# Altium PCB Glucometer-E.C.- Full V1.PcbDoc
Units mm, origin at the board's own origin, x right, y up, seen from the top; angles counter-clockwise.
Board outline 55 x 108 mm, 2 copper layers (Top Layer, Bottom Layer); 47 components, 57 nets, 234 pads, 33 vias.
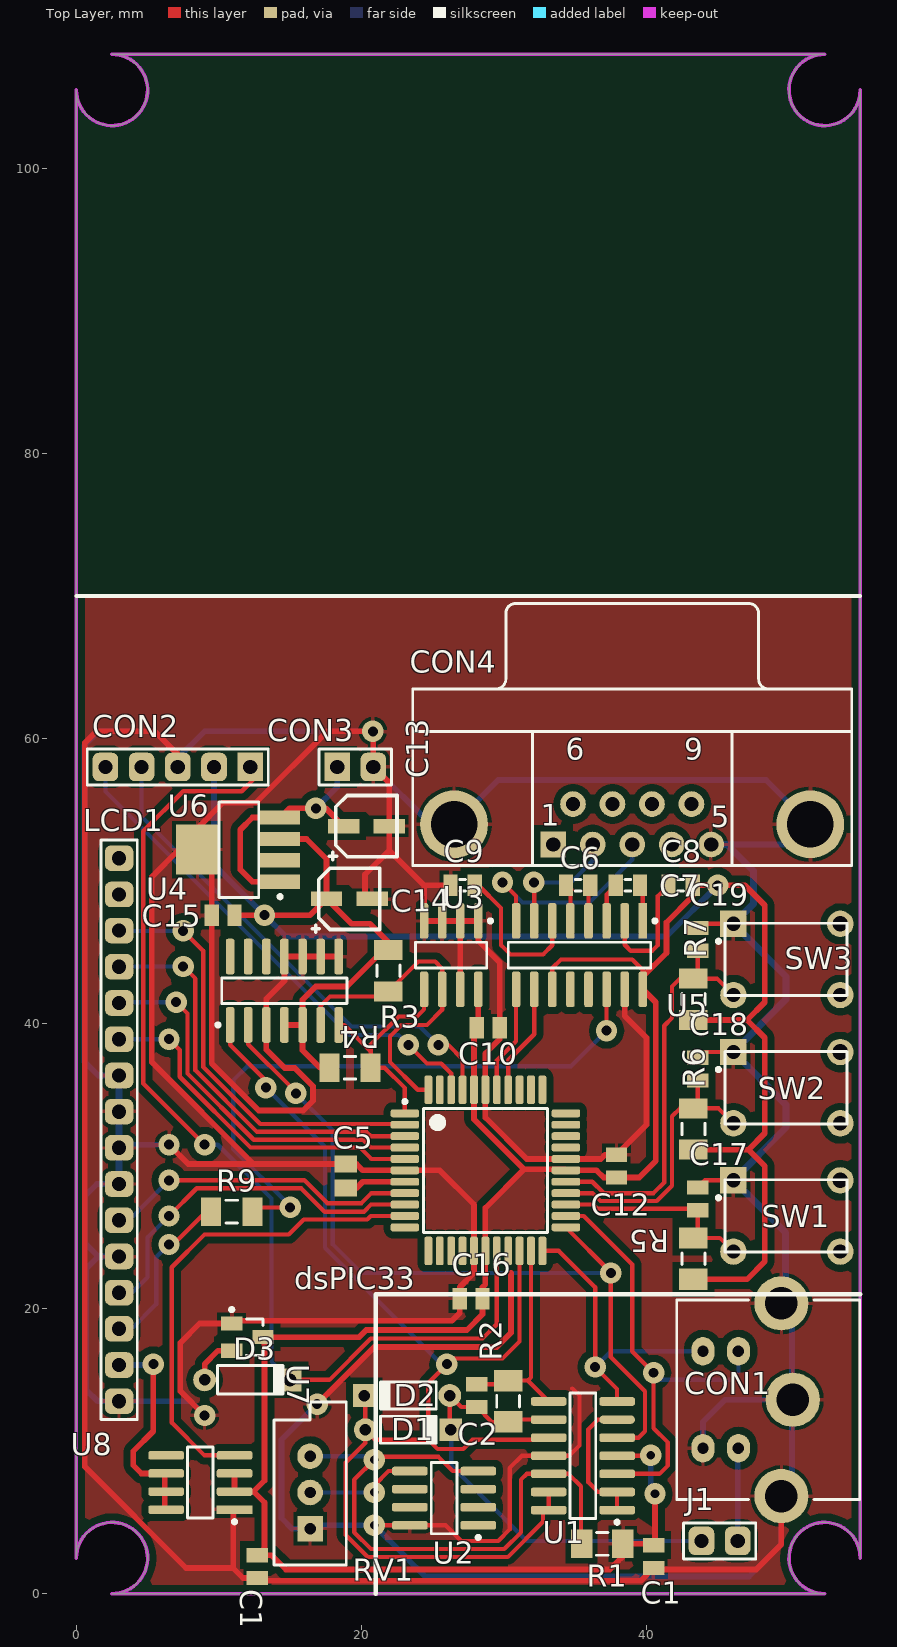
[diagram p0: Top Layer view]
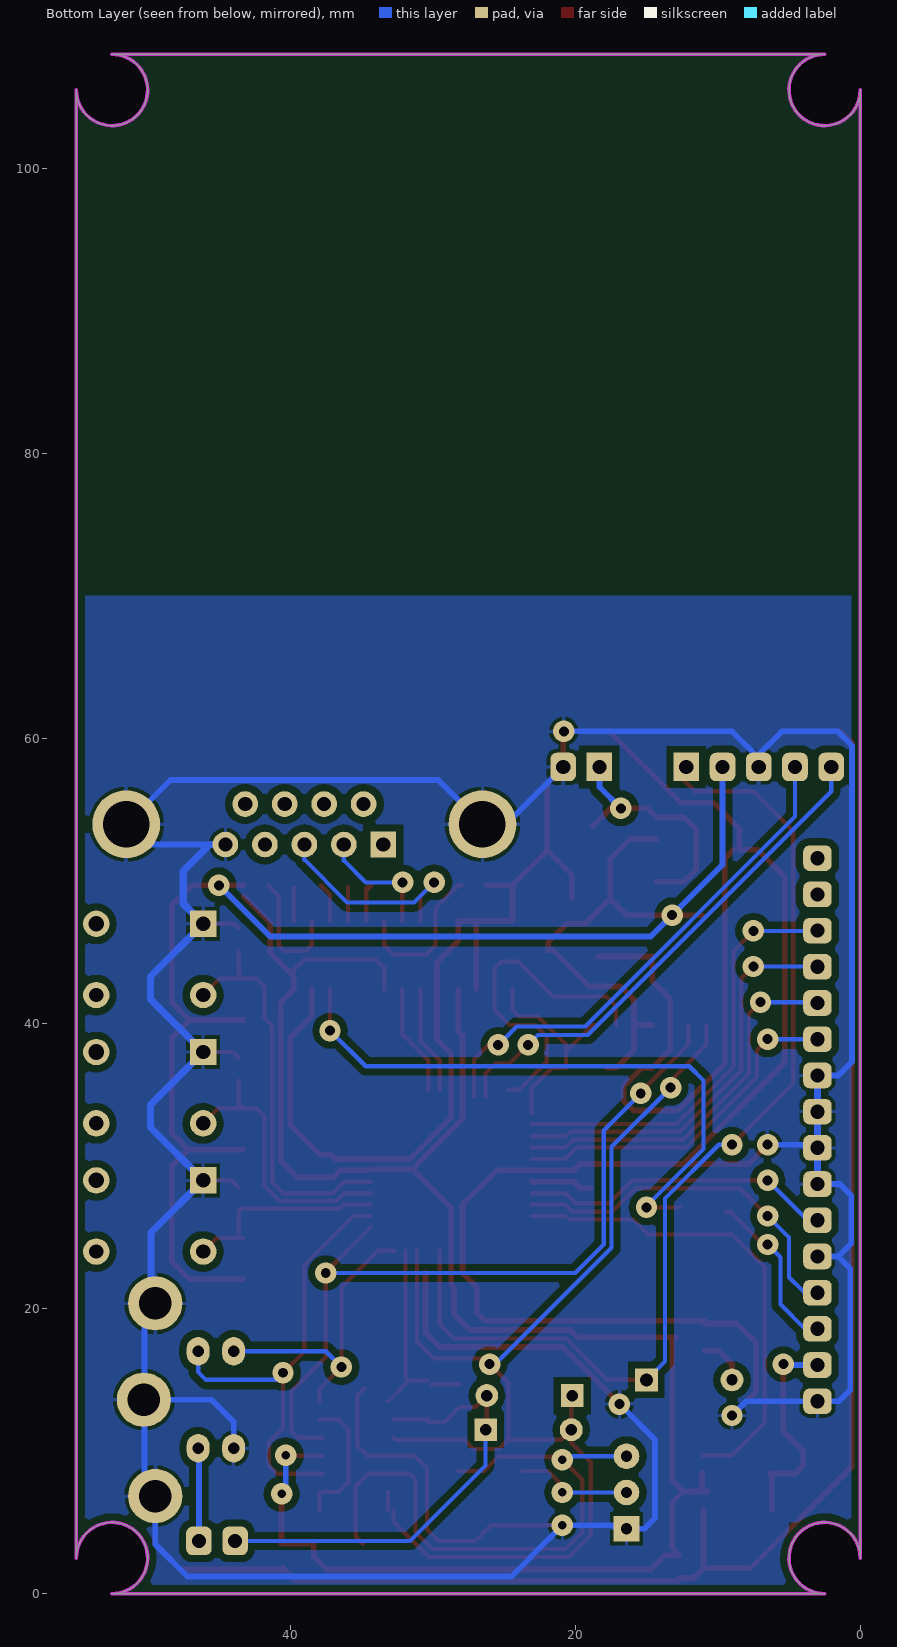
[diagram p1: Bottom Layer view, seen from below]

## Layer stack, top to bottom
Top Layer: signal copper 0.0356
Dielectric: dielectric 0.32, FR-4, Dk 4.8
Bottom Layer: signal copper 0.0356

## Board outline
0,2.5 cw(c2.5,2.5) 2.5,0 52.5,0 cw(c52.5,2.5) 55,2.5 55,105.5 cw(c52.5,105.5) 52.5,108 2.5,108 cw(c2.5,105.5) 0,105.5

## Design rules (kind name [scope] priority, off if disabled: settings)
Clearance [All] p1: gap=0.25
PolygonConnect [All] p1: connectstyle=Relief reliefconductorwidth=0.254 reliefentries=4 polygonreliefangle="90 Angle" airgapwidth=0.254
RoutingVias [All] p1: holewidth=0.711 width=1.27 viastyle="Through Hole" minholewidth=0.711 minwidth=1.27 maxholewidth=0.711 maxwidth=1.27
SolderMaskExpansion [All] p1: expansion=0.102
Width [All] p1: maxlimit=5 minlimit=0.25 preferedwidth=0.3 minimp=50.000000 maximp=50.000000 favimp=50.000000
28 further rules are at their usual default settings.

## Classes and differential pairs
component class "Glucometer-E.C.- Full V1": C1 C2 C5 C6 C7 C8 C9 C10 C13 C14 C15 C16 C17 C18 C19 CON1 CON3 CON4 D1 D2 D3 J1 LCD1 R1 R2 R3 R4 R5 R6 R7 R9 RV1 SW1 SW2 SW3 U1 U2 U3 U4 U5 U6 U7 U8

## Components (designator, comment, footprint, x,y, rotation, side; value= is the part's Value field where it differs from the comment)
C1 "Cap2" CAPC1608N 40.5,2.6 r270 top
C2 "Cap2" CAPC1608N 28.1,13.9 r90 top
C5 "Cap" CAPC2012N 18.9,29.3 r270 top
C6 "Cap" RESC1608N 38.7,49.7 r180 top
C7 "Cap" RESC1608N 35.2,49.7 r180 top
C8 "Cap" RESC1608N 42.4,49.7 r180 top
C9 "Cap" RESC1608N 27.1,49.7 r180 top
C10 "Cap" CAPC1608N 28.9,39.7 r180 top
C11 "Cap" CAPC1608N 12.7,1.9 r90 top
C12 "Cap" CAPC1608N 37.9,30 r270 top
C13 "Cap Pol2" C-4x4 22.5,56 r180 top
C14 "Cap Pol2" C-4x4 21.3,50.9 r180 top
C15 "Cap" CAPC1608N 10.3,47.6 r0 top
C16 "Cap" CAPC1608N 27.7,20.7 r0 top
C17 "Cap" CAPC1608N 43.6,27.7 r270 top
C18 "Cap" CAPC1608N 43.6,36.8 r270 top
C19 "Cap" CAPC1608N 43.6,45.9 r270 top
CON1 "" CDIN2.6-3H4A 54.964,13.606 r180 top
CON2 "Header 5" HDR1X5 12.2,58 r180 top
CON3 "Header 2" HDR1X2#1 18.3,58 r0 top
CON4 "D Connector 9" DSUB1.385-2H9 39,63.48 r0 top
D1 "1N4148" DO-35#1 23.3,11.5 r0 top
D2 "1N4148" DO-35#2 23.3,13.9 r180 top
D3 "1N4148" DO-35#3 12.2,15 r0 top
dsPIC33 "DSPIC33FJ64MC804-I/PT" TQFP-PT44_N 28.7,29.7 r0 top
J1 "Header 2" HDR1X2#2 46.4,3.7 r180 top
LCD1 "162A" HDR1X16 3,13.5 r90 top locked
R1 "Res1" RESC3216N#1 36.9,3.5 r0 top
R2 "Res1" RESC3216N#1 30.3,13.5 r270 top
R3 "Res1" RESC3216N#2 21.9,43.7 r270 top
R4 "Res1" RESC3216N#2 19.2,36.9 r0 top
R5 "Res1" RESC3216N#1 43.3,23.5 r270 top
R6 "Res1" RESC3216N#2 43.3,32.6 r270 top
R7 "Res1" RESC3216N#2 43.3,41.7 r270 top
R9 "Res1" RESC3216N#2 10.9,26.8 r0 top
RV1 "RPot" VR5 16.4,7.1 r90 top
SW1 "SW-PB" DPST-4 49.8,26.5 r0 top
SW2 "SW-PB" DPST-4 49.8,35.5 r0 top
SW3 "SW-PB" DPST-4 49.8,44.5 r0 top
U1 "LMC6044IN" M14A_N 35.541,9.674 r180 top
U2 "LM385BM" M08A_N 25.8,6.7 r180 top
U3 "24AA1025-I/SN" SOIC-SN8_N 26.3,44.8 r270 top
U4 "AD5241" R-14_N 14.6,42.3 r90 top
U5 "MAX3232CSE" NSO16_N 35.3,44.8 r270 top
U6 "LP38693MP-3.3/NOPB" MP05A_N 11.4,52.2 r180 top
U7 "Supply Voltage Supervisor" SOT23 12,18 r270 top
U8 "Power Switch ST" SO8_N 8.7,7.8 r180 top

## Footprints (in the part's own frame and the unit in brackets; to place one, negate y for a bottom-side part, rotate by r counter-clockwise, add the part's x,y. Pads: shape width x height; smd on the part's side, far side on the other; paste and mask are expansions set on the pad)
C-4x4 [mm] "SMD Polar Aluminium Capacitor, 4x4mm, 10V"
  rect 2.2x1 smd: 1(3.75,2.15) 2(0.55,2.15)
  silkscreen extent 0,0 4.75,4.5, body extent 0,0 4.3,4.3, height 5.4
CAPC1608N [mm] "Chip Capacitor, Body 1.6x0.8mm, IPC Medium Density"
  rect 1x1.5 smd: 1(-0.8,0) 2(0.8,0)
  body extent -0.87,-0.48 0.87,0.48, height 0.85
CAPC2012N [mm] "Chip Capacitor, Body 2.0x1.3mm, IPC Medium Density"
  rect 1.2x1.6 smd: 1(-0.85,0) 2(0.85,0)
  body extent -1.1,-0.72 1.1,0.72, height 1.1
CDIN2.6-3H4A [mm] "Connector; Circular DIN, Thru-Hole; 4 Position; Right Angle; Pitch 2.1/2.6 mm; Body 14 x 12.84 x 13 mm (WxTxH), Shielded, Special PCB Retention"
  oval 1.6x2 hole 0.8: 1(8.51,-3.4) 2(8.51,3.4) 3(11,-3.4) 4(11,3.4)
  round 3.8 hole 2.28: MH1(5.5,-6.76) MH2(4.7,0) MH3(5.5,6.76)
  silkscreen extent 0,-7 12.84,7, body extent 0,-7 12.84,7, height 13
DO-35#1 [mm] "Diode, Axial; Body 3.8 x 1.9 mm (LxDia. max), Lead Dia. 0.53 mm (max)"
  round 1.6 hole 0.8: 1(-3.025,0)
  rect 1.6x1.6 hole 0.8: 2(2.975,0)
  silkscreen extent -1.95,-0.95 2.05,0.95
DO-35#2 [mm] "Diode, Axial; Body 3.8 x 1.9 mm (LxDia. max), Lead Dia. 0.53 mm (max)"
  round 1.6 hole 0.8: 1(-2.9,0)
  rect 1.6x1.6 hole 0.8: 2(3.1,0)
  silkscreen extent -1.95,-0.95 2.05,0.95
DO-35#3 [mm] "Diode, Axial; Body 4.6 x 2 mm (LxDia. max), Lead Dia. 0.53 mm (max)"
  round 1.6 hole 0.8: 1(-3.2,0)
  rect 1.6x1.6 hole 0.9: 2(2.8,0)
  silkscreen extent -2.3,-1 2.4,1
DPST-4 [mm] "Switch; 4 Leads"
  rect 1.85x1.85 hole 1: 1(-3.7,2.5)
  round 1.85 hole 1: 2(-3.7,-2.5) 3(3.8,-2.5)
  round 1.85 hole 1.1: 4(3.8,2.5)
  silkscreen extent -4.88,-2.54 4.28,2.54
DSUB1.385-2H9 [mm] "Connector; D Subminiature; 9 Position; Right Angle; Pitch 1.385 mm"
  rect 1.8x1.8 hole 1: 1(-5.54,-10.92)
  round 1.8 hole 1: 2(-2.77,-10.92) 3(0,-10.92) 4(2.77,-10.92) 5(5.54,-10.92) 6(-4.155,-8.08) 7(-1.385,-8.08) 8(1.385,-8.08) 9(4.155,-8.08)
  round 4.76 hole 3.26: 10(-12.495,-9.5) 11(12.495,-9.5)
  silkscreen extent -15.4,-12.4 15.4,6
HDR1X2#1 [mm] "Connector; Header; 2 Position"
  rect 1.8x2 hole 1: 1(0,0)
  rrect50% 1.8x2 hole 1: 2(2.54,0)
  silkscreen extent -1.27,-1.27 3.81,1.27
HDR1X2#2 [mm] "Connector; Header; 2 Position"
  rrect50% 1.8x2 hole 1: 1(0,0) 2(2.54,0)
  silkscreen extent -1.27,-1.27 3.81,1.27
HDR1X5 [mm] "Connector; Header; 5 Position"
  rect 1.8x2 hole 1: 1(0,0)
  rrect50% 1.8x2 hole 1: 2(2.54,0) 3(5.08,0) 4(7.62,0) 5(10.16,0)
  silkscreen extent -1.27,-1.27 11.43,1.27
HDR1X16 [mm] "Connector; Header; 16 Position"
  rrect50% 1.8x2 hole 1: 1(0,0) 2(2.54,0) 3(5.08,0) 4(7.62,0) 5(10.16,0) 6(12.7,0) 7(15.24,0) 8(17.78,0) 9(20.32,0) 10(22.86,0) 11(25.4,0) 12(27.94,0) 13(30.48,0) 14(33.02,0) 15(35.56,0) 16(38.1,0)
  silkscreen extent -1.27,-1.27 39.37,1.27
M08A_N [mm] "SOIC, 8-Leads, Body 4.9x3.9mm, Pitch 1.27mm, IPC Medium Density"
  rrect50% 2.5x0.6 smd: 1(-2.4,1.905) 2(-2.4,0.635) 3(-2.4,-0.635) 4(-2.4,-1.905) 5(2.4,-1.905) 6(2.4,-0.635) 7(2.4,0.635) 8(2.4,1.905)
  silkscreen extent -2.53,-2.5 0.9,2.88, body extent -2,-2.5 2,2.5, height 1.75
M14A_N [mm] "SOIC, 14-Leads, Body 8.6x3.9mm, Pitch 1.27mm, IPC Medium Density"
  rrect50% 2.5x0.6 smd: 1(-2.4,3.81) 2(-2.4,2.54) 3(-2.4,1.27) 4(-2.4,0) 5(-2.4,-1.27) 7(-2.4,-3.81) 8(2.4,-3.81) 9(2.4,-2.54) 10(2.4,-1.27) 11(2.4,0) 12(2.4,1.27) 13(2.4,2.54) 14(2.4,3.81)
  oval 2.5x0.6 smd: 6(-2.4,-2.54)
  silkscreen extent -2.53,-4.4 0.9,4.78, body extent -2,-4.38 2,4.38, height 1.75
MP05A_N [mm] "SOT223, 5-Leads, Body 6.5x3.5mm, Pitch 1.5mm, Lead Span 7mm, IPC Medium Density"
  rect 2.8x1 smd: 1(-2.9,2.25) 2(-2.9,0.75) 3(-2.9,-0.75) 4(-2.9,-2.25)
  rect 3x3.5 smd: 5(2.9,0)
  silkscreen extent -3.03,-3.35 1.4,3.42, body extent -1.85,-3.35 1.85,3.35, height 1.8
NSO16_N [mm] "SOIC, 16-Leads, Body 9.9x3.9mm, Pitch 1.27mm, IPC Medium Density"
  rect 2.5x0.6 smd: 1(-2.4,4.445)
  rrect50% 2.5x0.6 smd: 2(-2.4,3.175) 3(-2.4,1.905) 4(-2.4,0.635) 5(-2.4,-0.635) 6(-2.4,-1.905) 7(-2.4,-3.175) 8(-2.4,-4.445) 9(2.4,-4.445) 10(2.4,-3.175) 11(2.4,-1.905) 12(2.4,-0.635) 13(2.4,0.635) 14(2.4,1.905) 15(2.4,3.175) 16(2.4,4.445)
  silkscreen extent -2.52,-5 0.9,5.42, body extent -2,-5 2,5, height 1.75
R-14_N [mm] "14-Pin Narrow Body Small Outline Integrated Circuit 1.27 mm Pitch, IPC Medium Density"
  rrect50% 2.5x0.6 smd: 1(-2.4,3.81) 2(-2.4,2.54) 3(-2.4,1.27) 4(-2.4,0) 5(-2.4,-1.27) 6(-2.4,-2.54) 7(-2.4,-3.81) 8(2.4,-3.81) 9(2.4,-2.54) 10(2.4,-1.27) 11(2.4,0) 12(2.4,1.27) 13(2.4,2.54) 14(2.4,3.81)
  silkscreen extent -2.52,-4.4 0.9,4.78, body extent -1.95,-4.33 1.95,4.33, height 1.75
RESC1608N [mm] "Chip Resistor, Body 1.6x0.8mm, IPC Medium Density"
  rect 1x1.5 smd: 1(-0.85,0) 2(0.85,0)
  silkscreen extent -0.2,-0.4 0.2,0.4, body extent -0.85,-0.48 0.85,0.48, height 0.6
RESC3216N#1 [mm] "Chip Resistor, Body 3.2x1.6mm, IPC Medium Density"
  rect 1.5x2 smd: 1(-1.45,0) 2(1.45,0)
  silkscreen extent -0.4,-0.8 0.4,0.8, body extent -1.68,-0.87 1.68,0.87, height 0.71
RESC3216N#2 [mm] "Chip Resistor, Body 3.2x1.6mm, IPC Medium Density"
  rect 1.4x2 smd: 1(-1.45,0) 2(1.45,0)
  silkscreen extent -0.4,-0.8 0.4,0.8, body extent -1.68,-0.87 1.68,0.87, height 0.71
SO8_N [mm] "SOIC, 8-Leads, Body 4.9x3.9mm, Pitch 1.27mm, IPC Medium Density"
  rect 2.5x0.6 smd: 1(-2.4,1.905)
  rrect50% 2.5x0.6 smd: 2(-2.4,0.635) 3(-2.4,-0.635) 4(-2.4,-1.905) 5(2.4,-1.905) 6(2.4,-0.635) 7(2.4,0.635) 8(2.4,1.905)
  silkscreen extent -2.53,-2.5 0.9,2.88, body extent -2,-2.5 2,2.5, height 1.75
SOIC-SN8_N [mm] "SOIC, 8-Leads, Body 4.9x3.8mm, Pitch 1.27mm, IPC Medium Density"
  rrect50% 2.5x0.6 smd: 1(-2.4,1.905) 2(-2.4,0.635) 3(-2.4,-0.635) 4(-2.4,-1.905) 5(2.4,-1.905) 6(2.4,-0.635) 7(2.4,0.635) 8(2.4,1.905)
  silkscreen extent -2.52,-2.5 0.9,2.88, body extent -2,-2.5 2,2.5, height 1.75
SOT23 [mm] "SOT-23; 3 Leads; Body 3.0 x 2.6 mm, inc. leads (LxW max)"
  rect 1x1.5 smd: 1(-0.95,-1.1) 2(0.95,-1.1) 3(0,1.1)
  silkscreen extent -2.05,-1.22 1.28,1.1
TQFP-PT44_N [mm] "Thin QFP, 44-Leads, Body 10x10mm, Pitch 0.8mm, IPC Medium Density"
  rrect50% 2x0.55 smd: 1(-5.65,4) 2(-5.65,3.2) 3(-5.65,2.4) 4(-5.65,1.6) 5(-5.65,0.8) 6(-5.65,0) 7(-5.65,-0.8) 8(-5.65,-1.6) 9(-5.65,-2.4) 10(-5.65,-3.2) 11(-5.65,-4) 23(5.65,-4) 24(5.65,-3.2) 25(5.65,-2.4) 26(5.65,-1.6) 27(5.65,-0.8) 28(5.65,0) 29(5.65,0.8) 30(5.65,1.6) 31(5.65,2.4) 32(5.65,3.2) 33(5.65,4)
  rrect50% 0.55x2 smd: 12(-4,-5.65) 13(-3.2,-5.65) 14(-2.4,-5.65) 15(-1.6,-5.65) 16(-0.8,-5.65) 17(0,-5.65) 18(0.8,-5.65) 19(1.6,-5.65) 20(2.4,-5.65) 21(3.2,-5.65) 22(4,-5.65) 34(4,5.65) 35(3.2,5.65) 36(2.4,5.65) 37(1.6,5.65) 38(0.8,5.65) 39(0,5.65) 40(-0.8,5.65) 41(-1.6,5.65) 42(-2.4,5.65) 43(-3.2,5.65) 44(-4,5.65)
  silkscreen extent -5.77,-4.35 4.35,4.95, body extent -5,-5 5,5, height 1.2
VR5 [mm] "Thru-Hole; 3 Leads"
  rect 1.8x1.8 hole 0.8: 1(-2.54,0)
  round 1.8 hole 0.8: 2(0,0) 3(2.54,0)
  silkscreen extent -5.08,-2.54 6.35,2.54

## Part data
C1 C2 C5 C6 C7 C8 C9 C10 C11 C12 C15 C16 C17 C18 C19: "Capacitor"
C13 C14: "Polarized Capacitor (Axial)"
CON1: library part "MiniDin 4Pins - SuperVideo", "MiniDin 4 Pins"
CON2: "Header, 5-Pin"
CON3 J1: "Header, 2-Pin"
CON4: "Receptacle Assembly, 9 Position, Right Angle"
D1 D2 D3: "High Conductance Fast Diode"
dsPIC33: "High-Performance 16-bit Digital Signal Controller, 64 KB Flash, 16 KB RAM, 44-Pin TQFP, Industrial Temperature"
LCD1: "16 char * 2 line LCD character display with b/light"
R1 R2 R3 R4 R5 R6 R7 R9: "Resistor"
RV1: "Potentiometer"
SW1 SW2 SW3: "Switch"
U1: "CMOS Quad Micropower Operational Amplifier, 14-pin MDIP"
U2: "Adjustable Micropower Voltage Reference, 8-pin Narrow SOIC"
U3: "1 Mbit, 400kHz, 1.7V, 8-Pin SOIC 150mil, Industrial Temperature"
U4: "AD5241BR"
U5: "3.0V TO 5.5V, Low-Power, up to 1Mbps, True RS-232 Transceiver Using Four 0.1µF External Capacitor"
U6: "500mA Low Dropout CMOS Linear Regulators Stable with Ceramic Output Capacitors, 5-pin SOT-223, Pb-Free"
U8: "STMPS2161"

## Via types
v1: diameter 1.5, hole 0.7, Top Layer to Bottom Layer, 28 vias
v2: diameter 1.5, hole 0.6, Top Layer to Bottom Layer, 5 vias

## Nets (pads, with @x,y where several pads share a name; then routed paths per layer and width w, separated by ;. In a path a pad name is that pad's centre, name@x,y a point inside that pad or via, vN(x,y) a via of type N, cw(c..) or ccw(c..) an arc to the next point about the centre after c; other vN are vias at no path point)
3.3V: C1.1 C8.1 C10.2 C11.2 C12.2 C14.1 C15.2 C16.2 CON2.2 dsPIC33.17 dsPIC33.28 dsPIC33.40 R1.2 R3.1 R4.1 R5.2 R6.2 R7.2 U1.4 U3.8 U4.4 U4.5 U5.11 U5.16 U6.3 U7.3 U8.2 U8.3 | length 265
  Top Layer w0.3: U5.11 33.395,43.895 34,44.5 39,44.5 39.745,43.755 U5.16@39.745,43.296 ; U1.4@37.741,9.674 v2@40.274,9.674
  Top Layer w0.4: U8.2@10.7,7.165 U8.2 ; U8.3 U8.2 ; C15.2 v1(13.2,47.6) 16.4,47.6 C14.1 ; U7.3@12.9,18 13.2,17.7 13.2,7.93 12.435,7.165 ; U7.3 19.844,18 20.344,18.5 27.4,18.5 28.5,19.6 C16.2 28.5,21.5 28.7,21.7 dsPIC33.17 28.7,27.069 31.406,29.775 ; U6.3 16.15,52.95 17.55,51.55 C14.1 ; U4.4 U4.5 ; R4.1 17.1,36.9 15.87,38.13 U4.5 ; U3.8 28.205,39.5 27.9,39.195 dsPIC33.40 27.9,33.281 31.406,29.775 ; v2@40.274,9.674 v2(40.3,9.7) ; C1.1@40.4,3.5 R1.2 38.35,2.627 37.423,1.7 14.7,1.7 13.7,2.7 C11.2 13.2,3.2 13.2,6.4 12.435,7.165 ; C1.1@40.6,3.5 40.6,6.5 41.1,7 v2(40.6,7) ; 43.25,48.95 41.4,47.1 41.4,44.951 39.745,43.296 U5.16 40.65,41.495 40.65,30.35 39.5,29.2 C12.2 37,29.2 36.5,29.7 dsPIC33.28 34.275,29.775 31.406,29.775 ; C8.1 46.9,49.7 48.3,48.3 48.3,41.5 47.05,40.25 ; R5.2 47.05,22.05 48.3,23.3 48.3,30 47.15,31.15 ; R6.2 47.15,31.15 ; R7.2 47.05,40.25 ; U8.2 12.435,7.165 ; U4.5 15.87,41.67 16.8,42.6 19,42.6 21.55,45.15 R3.1 21.9,45.7 20.6,47 19.3,47 C14.1 ; 47.05,40.25 48.3,39 48.3,32.3 47.15,31.15
  Bottom Layer w0.4: CON2.2 9.66,51.14 v1(13.2,47.6) 14.7,46.1 41.4,46.1 v1(45,49.7) ; v2(40.3,9.7) 40.3,7.3 v2(40.6,7)
-V: R9.2 U5.14 | length 43.4
  Top Layer w0.3: R9.2@12.65,27.1 v1(15,27.1) ; v1(37.2,39.5) U5.14@37.2,42.395
  Bottom Layer w0.3: v1@14.9,27.1 14.9,27.3 11,31.2 11,36 12,37 34.7,37 v1(37.2,39.5)
BTN_D: C19.2 dsPIC33.27 R7.1 SW3.2 | length 28.6
  Top Layer w0.3: dsPIC33.27 36.2,28.9 37,28.1 40.5,28.1 41.25,28.85 41.25,39.85 41.8,40.4 41.8,42.6 42.35,43.15 R7.1 ; C19.2 43.6,43.45 R7.1 ; SW3.2 44.95,43.15 R7.1
BTN_E: C18.2 dsPIC33.26 R6.1 SW2.2 | length 20
  Top Layer w0.3: dsPIC33.26 36.222,28.1 36.772,27.55 40.728,27.55 41.8,28.622 41.8,33.5 42.35,34.05 R6.1 ; C18.2 43.6,34.35 R6.1 ; SW2.2 45.05,34.05 R6.1
BTN_U: C17.2 dsPIC33.25 R5.1 SW1.2 | length 14.3
  Top Layer w0.3: dsPIC33.25 36.244,27.3 36.544,27 43.5,27 C17.2 R5.1@43.6,25.25 ; R5.1 45.15,24.95 SW1.2
CNT: CON1.3 dsPIC33.22 U1.7 | length 21.4
  Top Layer w0.3: dsPIC33.22 33.85,24.05 36.4,21.5 v1(36.4,15.9) 37.941,14.359 U1.7
  Bottom Layer w0.3: v1(36.4,15.9) 37.506,17.006 CON1.3
DB4: dsPIC33.5 LCD1.11 | length 24.6
  Top Layer w0.3: v1(6.5,38.9) 7.25,38.15 7.25,36.268 12.218,31.3 19.9,31.3 20.7,30.5 dsPIC33.5
  Bottom Layer w0.3: LCD1.11 v1(6.5,38.9)
DB5: dsPIC33.4 LCD1.12 | length 26.8
  Top Layer w0.3: v1(7,41.5) 7.8,40.7 7.8,36.496 12.446,31.85 20.128,31.85 20.678,31.3 dsPIC33.4
  Bottom Layer w0.3: LCD1.12 3.06,41.5 v1(7,41.5)
DB6: dsPIC33.3 LCD1.13 | length 28.8
  Top Layer w0.3: v1(7.5,44) 8.35,43.15 8.35,36.724 12.674,32.4 20.356,32.4 20.656,32.1 dsPIC33.3
  Bottom Layer w0.3: LCD1.13 3.02,44 v1(7.5,44)
DB7: dsPIC33.2 LCD1.14 | length 30.4
  Top Layer w0.3: v1(7.5,46.5) 8.9,45.1 8.9,36.951 12.901,32.95 23,32.95 dsPIC33.2
  Bottom Layer w0.3: LCD1.14@3.02,46.5 v1(7.5,46.5)
E: dsPIC33.8 LCD1.6 | length 22.2
  Top Layer w0.3: v1(6.5,29) 16,29 17.6,27.4 20,27.4 20.7,28.1 dsPIC33.8
  Bottom Layer w0.3: LCD1.6 3.7,26.2 v1(6.5,29)
GND: C1.2 C5.1 C9.2 C10.1 C11.1 C12.1 C13.2 C14.2 C15.1 C16.1 C17.1 C18.1 C19.1 CON1.4 CON1.MH1 CON1.MH2 CON1.MH3 CON2.3 CON3.2 CON4.5 CON4.10 CON4.11 dsPIC33.6 dsPIC33.16 dsPIC33.29 dsPIC33.39 LCD1.1 LCD1.5 LCD1.7 LCD1.8 LCD1.9 LCD1.10 RV1.1 SW1.1 SW2.1 SW3.1 U1.11 U2.8 U3.1 U3.2 U3.3 U3.4 U3.7 U4.3 U4.8 U4.9 U4.10 U4.11 U5.15 U6.5 U7.1 U8.1 | length 626
  Top Layer w0.3: v2(20.9,4.8) 25.9,4.8 27,3.7 29.6,3.7 30.4,4.5 30.4,8.808 31.266,9.674 U1.11 34.574,9.674 35.3,10.4 35.3,13.9 34.8,14.4 ; C17.1 44.1,29 SW1.1 ; C18.1 44,38 SW2.1 ; C19.1 43.9,47 SW3.1
  Top Layer w0.4: v1(6.5,31.5) 7.85,30.15 12.43,30.15 ; CON2.3 7.12,58.88 5.5,60.5 1.4,60.5 0.6,59.7 0.6,8.9 7.7,1.8 11,1.8 ; U6.5@8.9,52.2 9.5,51.6 C15.1 9.5,37.2 12.8,33.9 15.92,33.9 16.6,34.58 16.6,35.6 15.32,36.88 14.62,36.88 13.33,38.17 U4.3 13.33,41.73 14.6,43 U4.11 U4.10 U4.9 U4.8 ; v1(9,12.5) 7.3,14.2 7.3,17.6 8.65,18.95 U7.1 ; U7.1@10.9,19.15 26.35,19.15 26.9,19.7 C16.1 26.9,21.5 27.9,22.5 dsPIC33.16 27.9,27.3 25.5,29.7 dsPIC33.6 20.1,29.7 19.65,30.15 C5.1 12.43,30.15 ; U8.1@11,5.895 11,1.8 ; C11.1@12.7,0.9 39.6,0.9 C1.2 ; C11.1 11.7,1.1 11,1.8 ; v1(16.9,13.3) 20.9,17.3 29.5,17.3 30.5,18.3 30.5,22.5 ; C14.2@20.25,48.75 20.25,50.45 21.95,52.15 ; U3.4 U3.3 U3.2 ; U3.4@24.4,47.205 24.4,49.7 ; C9.2 24.4,49.7 ; U3.7 U3.2 ; U5.15 38.475,40.525 40,39 40,32.9 C12.1 37.1,30.8 36.8,30.5 dsPIC33.29 31.6,30.5 28.7,33.4 dsPIC33.39 28.7,37.9 29.7,38.9 C10.1 29.7,44.3 28.205,45.795 U3.1 U3.2 ; C1.2@40.5,1.7 47.7,1.7 49.464,3.464 CON1.MH3 ; 12.43,30.15 5.3,37.28 5.3,50.3 7.2,52.2 U6.5 8.5,53.7 10.3,55.5 12.6,55.5 17.6,60.5 v1(20.8,60.5) 20.84,60.46 CON3.2 21.95,56.89 C13.2 21.95,52.15 ; 21.95,52.15 24.4,49.7
  Bottom Layer w0.3: CON4.11@50.075,52.56 CON4.11
  Bottom Layer w0.4: LCD1.5 1.54,23.66 ; LCD1.7 1.44,28.74 0.627,27.927 0.627,24.573 1.54,23.66 ; LCD1.8 3.22,31.5 v1(6.5,31.5) ; LCD1.10 1.54,36.36 0.577,37.323 0.577,59.5 1.577,60.5 5.5,60.5 7.12,58.88 CON2.3@7.12,58.62 ; CON2.3 CON2.3@7.12,58.62 ; v1(9,12.5) 8,13.5 LCD1.1 1.5,13.5 0.7,14.3 0.7,22.82 1.54,23.66 ; RV1.1 15.14,4.56 14.4,5.3 14.4,10.8 v1(16.9,13.3) ; RV1.1@17.1,4.56 17.34,4.8 v2(20.9,4.8) 23.1,2.6 ; v1(20.8,60.5) 9,60.5 CON2.3@7.12,58.62 ; CON3.2@20.84,58.76 CON3.2 24.86,53.98 CON4.10 ; 23.1,2.577 24.477,1.2 47.2,1.2 49.464,3.464 49.464,6.812 CON1.MH3 ; CON4.10@26.485,54 CON4.10 ; CON1.4 43.964,12.064 45.506,13.606 CON1.MH2@50.216,13.606 ; CON4.5 CON4.11@50.075,52.56 ; CON1.MH3@50.216,7.564 CON1.MH2@50.216,13.606 ; CON1.MH1@50.216,19.484 CON1.MH2@50.216,13.606 ; CON1.MH2 CON1.MH2@50.216,13.606 ; CON4.11 48.395,57.08 29.605,57.08 CON4.10
  Bottom Layer w0.5: LCD1.7 LCD1.8 LCD1.9 LCD1.10 ; CON4.5 45.64,52.56 47.5,50.7 47.5,48.4 SW3.1 49.8,43.3 49.8,41.7 SW2.1 49.8,34.3 49.8,32.7 SW1.1 49.764,25.336 CON1.MH1@49.764,20.366 ; CON1.MH1@49.416,20.284 CON1.MH1@50.216,19.484 ; CON1.MH3@49.464,6.812 CON1.MH3@50.216,7.564
LCDPWR: dsPIC33.10 U8.4 | length 34.1
  Top Layer w0.3: U8.4 8.995,9.705 6.7,12 6.7,22.9 9,25.2 14.9,25.2 15.95,26.25 20.406,26.25 20.656,26.5 dsPIC33.10
LCDVDD: LCD1.2 U8.6 U8.7 U8.8 | length 15.1
  Top Layer w0.4: v1(5.4,16.1) 5.4,11.4 4,10 4,9 4.565,8.435 U8.6@6.2,8.435 ; U8.8@6.2,5.895 U8.6@6.2,8.435 ; U8.6 U8.6@6.2,8.435
  Bottom Layer w0.4: LCD1.2 v1@5.34,16.04
LCDVO: LCD1.3 R9.1 | length 11.8
  Top Layer w0.3: LCD1.3 LCD1.3@3.03,18.55 ; v1(6.5,24.5) 6.8,24.5 9.1,26.8 R9.1@9.4,26.8
  Bottom Layer w0.3: LCD1.3 3.88,18.58 5.6,20.3 5.6,23.6 v1(6.5,24.5)
MCLR: CON2.1 D3.2 dsPIC33.18 | length 75.2
  Top Layer w0.3: v1(9,31.5) 4.7,35.8 4.7,53.5 7.5,56.3 11.6,56.3 12.6,57.3 CON2.1@12.6,58.5 ; D3.2 17.751,15 20.651,17.9 28.5,17.9 29.5,18.9 dsPIC33.18
  Bottom Layer w0.3: v1(9,31.5) 9.922,31.5 13.7,27.722 13.7,16.3 D3.2
NetC5_2: C5.2 dsPIC33.7 | length 4.3
  Top Layer w0.4: C5.2 19.65,28.45 20.1,28.9 dsPIC33.7
NetC6_1: C6.1 U5.1 | length 2.3
  Top Layer w0.3: U5.1 C6.1@39.745,49.505
NetC6_2: C6.2 U5.3 | length 2.8
  Top Layer w0.3: U5.3 37.205,49.055 C6.2
NetC7_1: C7.1 U5.4 | length 2.4
  Top Layer w0.3: U5.4 C7.1@35.935,49.585
NetC7_2: C7.2 U5.5 | length 2.6
  Top Layer w0.3: U5.5 C7.2@34.665,49.385
  Top Layer w0.4: C7.2 C7.2@34.665,49.385
NetC8_2: C8.2 U5.2 | length 8.9
  Top Layer w0.3: U5.2 38.475,45.525 38.9,45.1 40.4,45.1 40.8,45.5 40.8,48.95 C8.2
NetC9_1: C9.1 U5.6 | length 10.9
  Top Layer w0.3: C9.1 28.2,49.7 29.8,48.1 29.8,45.5 30.45,44.85 32.75,44.85 33.395,45.495 U5.6
NetD3_1: D3.1 U7.2 | length 3.4
  Top Layer w0.4: D3.1 9,16.1 9.95,17.05 U7.2
NetdsPIC33_11: dsPIC33.11
NetdsPIC33_12: dsPIC33.12
NetdsPIC33_13: dsPIC33.13
NetdsPIC33_14: dsPIC33.14
NetdsPIC33_15: dsPIC33.15
NetdsPIC33_19: dsPIC33.19
NetdsPIC33_30: dsPIC33.30
NetdsPIC33_31: dsPIC33.31
NetdsPIC33_32: dsPIC33.32
NetdsPIC33_33: dsPIC33.33
NetdsPIC33_34: dsPIC33.34
NetdsPIC33_35: dsPIC33.35
NetdsPIC33_36: dsPIC33.36
NetdsPIC33_43: dsPIC33.43
NetR1_1: R1.1 RV1.3 U1.12 U2.4 | length 42.7
  Top Layer w0.3: U2.4 26.405,8.605 25.41,9.6 21.1,9.6 v2(20.9,9.4) 19.5,8 19.5,4.3 20.673,3.127 30.027,3.127 31.2,4.3 31.2,8 31.604,8.404 U1.12 34.536,8.404 35.4,7.54 35.4,4 R1.1@34.9,3.5
  Bottom Layer w0.3: RV1.3@17.1,9.64 20.66,9.64 v2(20.9,9.4)
NetRV1_3: RV1.2 U2.5 | length 7.5
  Top Layer w0.3: v2(20.9,7.1) 20.9,7.6 21.9,8.6 U2.5@23.7,8.6
  Bottom Layer w0.3: RV1.2@17.1,7.1 v2(20.9,7.1)
NetU1_1: U1.1 U1.2 U1.6 | length 9.6
  Top Layer w0.3: U1.1 U1.2 36.606,7.134 35.916,7.824 35.916,11.524 36.606,12.214 U1.6
PEGC: CON2.5 dsPIC33.42 | length 36.7
  Top Layer w0.3: CON2.5@2.04,57.16 CON2.5 ; v1(23.3,38.5) 24.6,37.2 25.6,37.2 26.3,36.5 dsPIC33.42@26.3,34.85
  Bottom Layer w0.3: CON2.5 2.04,56.282 19.122,39.2 22.6,39.2 v1(23.3,38.5)
PEGD: CON2.4 dsPIC33.41 | length 36.2
  Top Layer w0.3: CON2.4@4.98,58 CON2.4@4.98,58.5 ; v1(25.4,38.5) 26.1,38.5 27.1,37.5 dsPIC33.41@27.1,34.85
  Bottom Layer w0.3: CON2.4 4.58,54.52 19.3,39.8 24.1,39.8 v1(25.4,38.5)
REF: CON1.1 dsPIC33.24 U1.3 | length 33
  Top Layer w0.3: dsPIC33.24 35.6,26.5 39,23.1 39,17 v1(40.5,15.5) 40.5,11.6 41.5,10.6 41.5,9 40.904,8.404 U1.3 U1.3@37.741,8.404
  Bottom Layer w0.3: v1(40.5,15.5) 41,15 45.908,15 46.454,15.546 CON1.1
RS: dsPIC33.9 LCD1.4 | length 25.6
  Top Layer w0.3: v1(6.5,26.5) 8.45,28.45 15.772,28.45 17.422,26.8 20.178,26.8 20.678,27.3 dsPIC33.9
  Bottom Layer w0.3: LCD1.4 3.92,21.12 5,22.2 5,25 v1(6.5,26.5)
RXD: CON4.2 U5.7 | length 8.2
  Top Layer w0.3: U5.7 v1@32.125,49.525
  Bottom Layer w0.3: v1(32.1,49.9) 34.7,49.9 36.23,51.43 CON4.2
SCL1: dsPIC33.44 R3.2 U3.6 U4.6 | length 24
  Top Layer w0.3: U4.6 17.14,41.24 17.8,41.9 21.55,41.9 R3.2 24,44.35 25.18,44.35 25.665,43.865 25.665,40.965 24.6,39.9 22.8,39.9 22,39.1 22,37.3 23.95,35.35 dsPIC33.44
SDA1: dsPIC33.1 R4.2 U3.5 U4.7 | length 15.6
  Top Layer w0.3: U4.7 18.8,39.9 20.65,38.05 ; dsPIC33.1 23.05,35.472 21.622,36.9 R4.2 20.65,38.05 ; U3.5 24.395,40.995 23.9,40.5 22.622,40.5 20.65,38.528 20.65,38.05
TXD: CON4.3 U5.8 | length 15.4
  Top Layer w0.3: v1(29.9,49.9) 30.855,48.945 U5.8 ; v1@30.205,49.595 v1@30.455,49.845
  Bottom Layer w0.3: v1(29.9,49.9) 31.3,48.5 36,48.5 39,51.5 CON4.3
U1RX: dsPIC33.38 U5.9 | length 7.6
  Top Layer w0.3: dsPIC33.38 29.5,37.4 30.855,38.755 U5.9
U1TX: dsPIC33.37 U5.10 | length 7.8
  Top Layer w0.3: dsPIC33.37 30.3,37.422 32.125,39.247 U5.10
VCTRL: dsPIC33.23 U1.5 U4.2 | length 56.5
  Top Layer w0.3: U4.2 12.06,38.54 v1@15.05,35.55 ; dsPIC33.23 37.5,22.55 v1(37.5,22.5) 37.5,16.6 39.9,14.2 39.9,11.4 39.444,10.944 U1.5@37.741,10.944
  Bottom Layer w0.3: v1(15.4,35.1) 18,32.5 18,24.5 20,22.5 v1(37.5,22.5)
VDD: C13.1 CON3.1 U6.1 U6.4 | length 17.9
  Top Layer w0.4: U6.1 12.35,49.95 11.5,50.8 11.5,53.6 12.35,54.45 U6.4 14.95,55.1 v1(16.8,55.1) 17.5,55.1 C13.1
  Bottom Layer w0.4: v1(16.8,55.1) 18.3,56.6 CON3.1
VGND: D1.1 D2.2 dsPIC33.20 U1.10 U1.13 U1.14 U4.1 | length 89.6
  Top Layer w0.3: U4.1 10.79,38.51 13.5,35.8 v1@13.5,35.5 ; D2.2@20.275,13.825 D1.1 ; dsPIC33.20 31.1,17.7 29.9,16.5 26.4,16.5 v1(26,16.1) 24.7,14.8 24.7,10.8 ; U1.14@32.741,5.864 32.741,5.041 30.277,2.577 20.445,2.577 18.9,4.122 18.9,9.2 20.275,10.575 D1.1 ; U1.10@32.741,10.944 32.597,10.8 27.8,10.8 27.15,10.15 25.35,10.15 24.7,10.8 ; U1.14 U1.13 ; D1.1 20.975,10.8 24.7,10.8
  Bottom Layer w0.3: v1(13.3,35.5) 17.45,31.35 17.45,24.272 25.622,16.1 v1(26,16.1)
VOUT: C2.2 dsPIC33.21 R2.1 U1.8 | length 14.6
  Top Layer w0.3: C2.2 R2.1@30.05,14.7 ; R2.1 31.675,14.95 ; dsPIC33.21 31.9,15.175 31.675,14.95 ; U1.8 31.675,14.95
WRK: CON1.2 J1.1 | length 7.2
  Bottom Layer w0.3: CON1.2@46.406,10.124 46.406,10.158 CON1.2@46.406,10.774
  Bottom Layer w0.4: J1.1 46.4,10.152 46.406,10.158 CON1.2
WRKIN: C2.1 D1.2 D2.1 J1.2 R2.2 U1.9 | length 30.4
  Top Layer w0.3: D1.2@26.2,12.275 26.2,13.1 ; D2.1 27,13.1 C2.1 29.15,12.05 R2.2 ; R2.2@30.3,12.214 U1.9@32.741,12.214
  Bottom Layer w0.3: D1.2@26.3,11.5 26.3,9 31.6,3.7 J1.2
pads on no net: CON4.1 CON4.4 CON4.6 CON4.7 CON4.8 CON4.9 LCD1.15 LCD1.16 SW1.3 SW1.4 SW2.3 SW2.4 SW3.3 SW3.4 U2.1 U2.2 U2.3 U2.6 U2.7 U4.12 U4.13 U4.14 U5.12 U5.13 U6.2 U8.5

## Polygon pours and split planes (outlines as drawn)
GND on Top Layer "Bottom Layer-No Net" (solid, pour order 22): 0,70 0,5 5,5 5,0 50,0 50,5 55,5 55,70
3.3V on Top Layer "Bottom Layer-No Net" (solid, pour order 20): 30.3,1.7 30.3,2.554 30.277,2.577 33.141,5.441 33.141,7.134 37.941,7.134 40.5,4.575 40.5,3.4 38.8,1.7
3.3V on Top Layer "Bottom Layer-No Net" (solid, pour order 18): 28.7,24.9 33.5,24.9 33.5,29.5 33.4,29.6 31.4,29.6 31.231,29.6 28.7,27.069 28.7,24.9
GND on Bottom Layer "Bottom Layer-No Net" (solid, pour order 16): 5,0 5,5 0,5 0,70 55,70 55,4.9 54.9,5 50.1,5 50.1,0.1 50.2,0

## Keep-outs
Keep-Out Layer:
  the board outline again, w0.254

## Silkscreen, mask and mechanical layers (free items; w line width, h text height)
Top Overlay:
  lines w0.254: 0,70 55,70
  lines w0.3: 21,0 21,21 55,21

## Dimensions
0,0 to 55,0 on Keep-Out Layer
55,0 to 55,108 on Keep-Out Layer

## Text inside footprints (layer, text, board x,y; h text height)
CON1: Mechanical 1 "PCB Edge" at 54.364,20.306 h0.25 r270
CON4: Top Overlay "6" at 34.345,58.505 h1.5; Top Overlay "9" at 42.655,58.505 h1.5; Top Overlay "5" at 44.5,53.78 h1.5; Top Overlay "1" at 32.6,53.88 h1.5